# EAGLE board sensori di linea soccer 2018 (EAGLE 8.5.2)
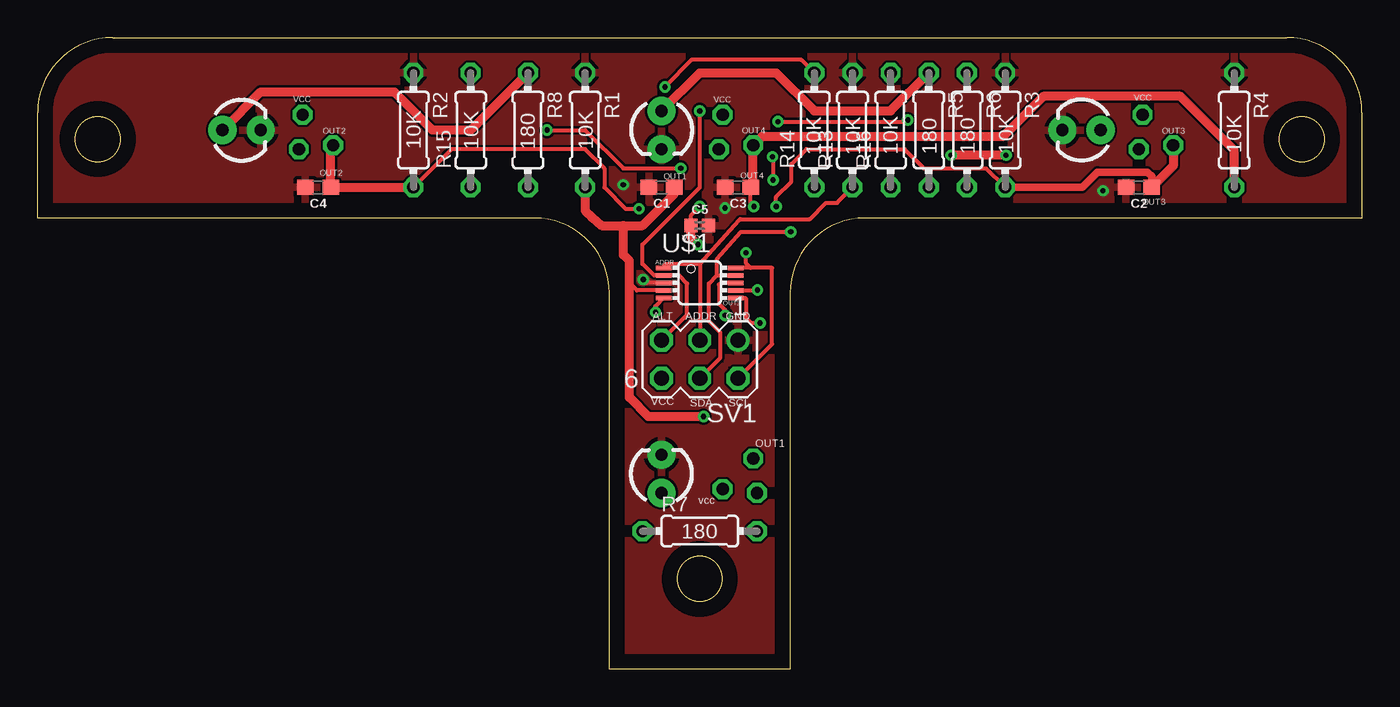
[diagram p0: board, top side]
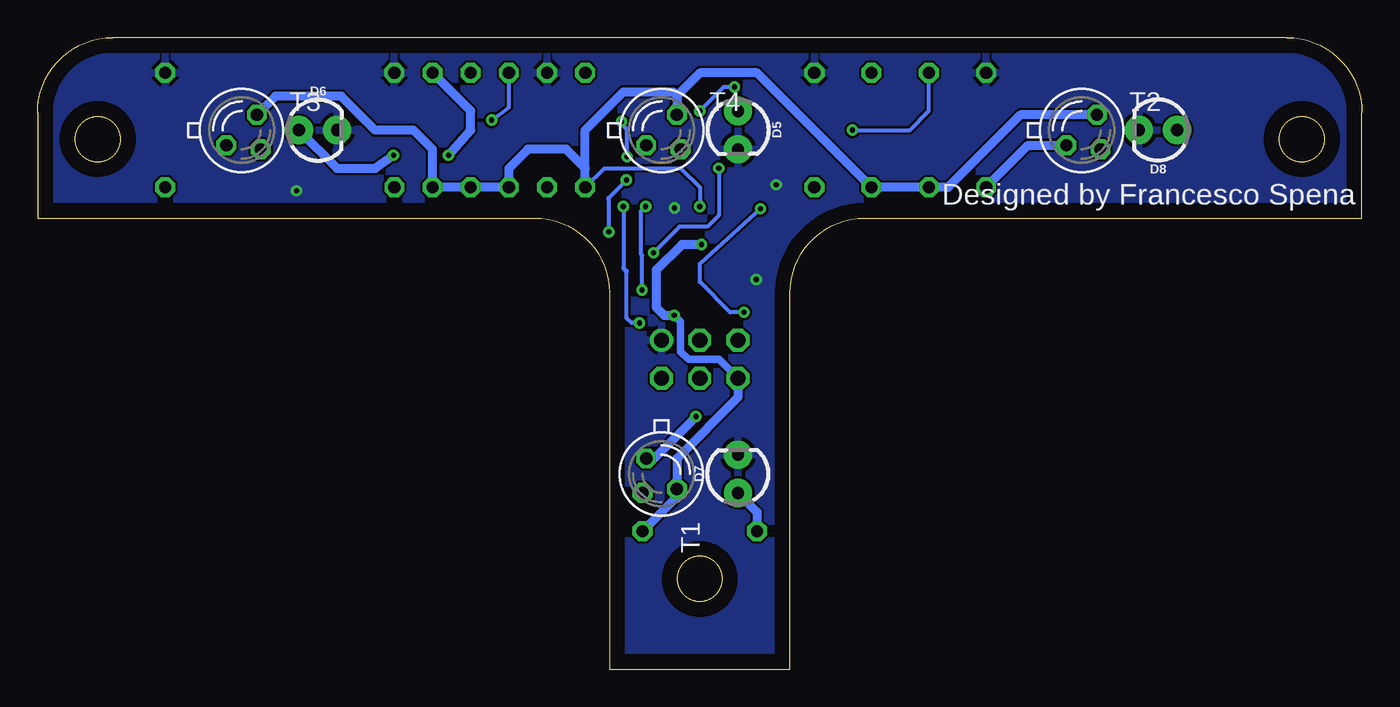
[diagram p1: board, bottom side, seen from below]

Size 88.1 x 42 mm. Coordinates in mm from the lower left corner, seen from the top.
Outline: 50.05,0 38.05,0 38.05,25 arc90 33.05,30 0,30 0,37 arc-90 5,42 83.1,42 arc-90 88.1,37 88.1,30 55.05,30 arc90 50.05,25 50.05,0
Outline: circle at 4,35.25 radius 1.5
Outline: circle at 84.1,35.25 radius 1.5
Outline: circle at 44.05,6 radius 1.5
Copper layers (1*16): Top 0.035mm / dielectric 1.5mm / Bottom 0.035mm
Design rules "default": minimum track width 6mil, minimum drill 0.35mm, track to track 6mil, track to pad 6mil, pad to pad 6mil, via to via 6mil, smd to smd 6mil, copper to edge 40mil, drill to drill 6mil, minimum pad ring 10mil, minimum via ring 8mil, stop-mask expansion 4mil, vias tented up to drill 0mil, thermal gap 10mil

## Footprints (pad centres in the part's own frame; a part is rotated, then mirrored left to right if it is on the bottom)
0603 = smd 1.1 x 1: 1 -0.85,0; 2 0.85,0
0402 = smd 0.85 x 0.9: 1 -0.58,0; 2 0.58,0
LED_3MM = drill 0.813 pad 1.88: A -1.27,0; K 1.27,0
0204/7 = drill 0.813 octagon: 1 -3.81,0; 2 3.81,0
MA03-2 = drill 1.016: 1 -2.54,-1.27 | drill 1.016 octagon: 2 -2.54,1.27; 3 0,-1.27; 4 0,1.27; 5 2.54,-1.27; 6 2.54,1.27
BP103 = drill 0.813 octagon: B 1.27,-1.27; C 1.016,1.016; E -1.016,-1.016
MSOP10_0.5 = smd 0.3 x 1.02: 1 -1,-2.4; 2 -0.5,-2.4; 3 0,-2.4; 4 0.5,-2.4; 5 1,-2.4; 6 1,2.4; 7 0.5,2.4; 8 0,2.4; 9 -0.5,2.4; 10 -1,2.4

## Placement (x,y rotation side)
C1  3.3nF  [0603]  41.51,32.04 180 top
C2  3.3nF  [0603]  73.26,32.04 180 top
C3  3.3nF  [0603]  46.59,32.04 180 top
C4  3.3nF  [0603]  18.65,32.04 180 top
C5  1.0uF  [0402]  44.05,29.5 0 top
D5  [LED_3MM]  41.51,35.85 270 bottom
D6  [LED_3MM]  69.45,35.85 0 bottom
D7  [LED_3MM]  41.51,12.99 90 bottom
D8  [LED_3MM]  13.57,35.85 180 bottom
R1  10K  [0204/7]  36.43,35.85 270 top
R2  10K  [0204/7]  25,35.85 270 top
R3  10K  [0204/7]  64.37,35.85 270 top
R4  10K  [0204/7]  79.61,35.85 270 top
R5  180  [0204/7]  59.29,35.85 270 top
R6  180  [0204/7]  61.83,35.85 270 top
R7  180  [0204/7]  44.05,9.18 0 top
R8  [0204/7]  32.62,35.85 270 top
R13  10K  [0204/7]  54.21,35.85 90 top
R14  10K  [0204/7]  51.67,35.85 90 top
R15  10K  [0204/7]  28.81,35.85 90 top
R16  10K  [0204/7]  56.75,35.85 90 top
SV1  [MA03-2]  44.05,20.61 180 top
T1  BP103  [BP103]  46.59,12.99 270 bottom
T2  BP103  [BP103]  18.65,35.85 0 bottom
T3  BP103  [BP103]  74.53,35.85 0 bottom
T4  BP103  [BP103]  46.59,35.85 0 bottom
U$1  ADS1015IDGT  [MSOP10_0.5]  44.05,25.69 270 top

## Library data of the parts
C1-C4 = SparkFun-Capacitors; PROD_ID: CAP-09633
C5 = SparkFun-Capacitors; PROD_ID: CAP-12417
D5-D8 = SparkFun-LED; PROD_ID: DIO-08794
R1-R4 R13-R16 = resistor
R5-R8 = rcl
SV1 = con-lstb; OC_FARNELL: unknown; OC_NEWARK: unknown
T1-T4 = opto-trans-siemens; OC_FARNELL: unknown; OC_NEWARK: unknown
U$1 = bt_adc

## Nets
ADDR: R13.1 SV1.3 U$1.1
ALERT: R14.2 SV1.5 U$1.2
GND: C1.2 C2.2 C3.2 C4.2 C5.2 D5.K D6.K D7.K D8.K R1.1 R2.1 R3.1 R4.1 R13.2 SV1.1 U$1.3
N$2: D5.A R5.1
N$3: D6.A R6.1
N$4: D7.A R7.1
N$5: D8.A R8.1
OUT1: C1.1 R1.2 T1.E U$1.4
OUT2: C4.1 R2.2 T2.E U$1.5
OUT3: C2.1 R3.2 T3.E U$1.6
OUT4: C3.1 R4.2 T4.E U$1.7
SCL: R15.2 SV1.2 U$1.10
SDA: R16.2 SV1.4 U$1.9
VCC: C5.1 R5.2 R6.2 R7.2 R8.2 R14.1 R15.1 R16.1 SV1.6 T1.C T2.C T3.C T4.C U$1.8

## Tracks (layer width: path | path; a pad name or v marks a point on that pad's centre or on a via)
ADDR
  Top 0.254: U$1.1 arc-90 41.92,26.96 44.05,26.96 | 44.05,26.96 SV1.3 | 44.05,26.96 46.67,29.86 46.74,29.93 51.37,29.93 52.45,31.01 53.18,31.01 R13.1
ALERT  (via drill 0.35)
  Top 0.254: v44.05,37.12 44.05,32.04 40.24,28.23 40.24,26.96 41.01,26.19 U$1.2 42.66,26.19 43.21,25.64 43.21,23.58 SV1.5 | R14.2 50.81,40.52 43.52,40.52 41.74,38.75 v41.74,38.72
  Bottom 0.254: 41.71,38.72 v41.74,38.72 42.45,38.72 v44.05,37.12
GND  (via drill 0.35)
  Top 0.254: U$1.3 40.52,25.69 v40.29,25.92
  other vias: 70.87,31.81 38.97,32.22 45.73,30.67
  pour Top: 46.59,46.01 -1.67,46.01 -1.67,-2.25 91.04,-2.25 91.04,46.01
  pour Bottom: 27.54,46.01 -1.67,46.01 -1.67,-2.25 91.04,-2.25 91.04,46.01
N$2
  Top 0.61: D5.A 44.05,39.66 49.13,39.66 51.67,37.12 56.75,37.12 R5.1
N$3  (via drill 0.35)
  Top 0.61: v64.42,34.17 v60.76,34.17
  Bottom 0.61: D6.A 68.18,33.31 65.64,33.31 v64.42,34.17 | v60.76,34.17 59.29,35.85 59.29,37.12 R6.1
N$4
  Bottom 0.61: D7.A 40.24,10.45 R7.1
N$5
  Top 0.61: D8.A 14.84,38.39 23.73,38.39 26.27,35.85 28.81,35.85 R8.1
OUT1  (via drill 0.35)
  Top 0.254: U$1.4 39.87,25.19 39.37,25.69
  Top 0.61: 38.97,29.5 40.24,29.5 42.36,31.62 C1.1 | v44.31,16.8 40.64,16.8 39.37,18.07 39.37,25.69 39.37,27.15 38.97,27.55 38.97,29.5 | R1.2 36.43,30.49 36.88,30.04 37.52,29.5 38.97,29.5
  Bottom 0.61: v44.31,16.8 47.1,14.01 T1.E
OUT2  (via drill 0.35)
  Top 0.254: R2.2 27.54,34.58 36.43,34.58 37.7,33.31 37.7,32.04 39.12,30.62 v40.01,30.62 | U$1.5 41.11,24.14 v41.11,23.73
  Top 0.61: T2.E 19.5,34.67 C4.1 R2.2
  Bottom 0.254: v40.01,30.62 44.05,26.96 44.05,25.75 42.03,23.73 v41.11,23.73
  Bottom 0.61: T2.E 22.21,34.83 R2.2
OUT3  (via drill 0.35)
  Top 0.254: R3.2 63.1,33.31 58.95,33.31 57.68,34.58 51.14,34.58 50.15,33.59 50.15,32.42 49.13,31.41 v49.13,30.77 | U$1.6 47.07,24.69 47.14,24.62 47.14,23.35 47.47,23.03 v48.06,23.03
  Top 0.508: R3.2 69.5,32.04 70.52,33.06 73.82,33.06 74.11,32.77 C2.1
  Top 0.61: C2.1 75.55,33.48 T3.E
  Bottom 0.254: v49.13,30.77 49.13,26.7 | 49.13,26.7 48.91,26.47 | 49.13,26.7 49.09,26.6 48.91,26.41 48.91,23.35 48.59,23.03 v48.06,23.03
OUT4  (via drill 0.35)
  Top 0.254: U$1.7 47.87,25.19 v47.89,25.21 | v47.65,30.77 47.44,30.98 C3.1
  Top 0.61: C3.1 47.61,32.21 T4.E 48.19,35.42 64.23,35.42 66.91,38.1 76.03,38.1 79.61,34.52 R4.2
  Bottom 0.254: v47.89,25.21 47.89,27.52 47.96,27.6 47.96,30.46 v47.65,30.77
SCL  (via drill 0.35)
  Top 0.254: SV1.2 48.86,21.61 48.86,26.69 47.43,26.69 | 47.43,26.69 U$1.10 | v33.89,35.85 36.43,35.85 38.97,33.31 v42.78,33.31 | 47.43,26.69 47.13,26.99 v47.13,27.7
  Bottom 0.254: v33.89,35.85 30.08,35.85 28.81,37.12 R15.2 | 46.59,28.23 v47.13,27.7 45.4,29.42 43.54,29.42 42.78,30.19 v42.78,33.31
SDA  (via drill 0.35)
  Top 0.254: v49.26,36.41 57.79,36.41 v57.89,36.51 | SV1.4 45.42,20.71 45.42,22.39 44.66,23.15 44.66,25.64 45.21,26.19 | 45.21,26.19 U$1.9 | 45.21,26.19 45.21,27.28 46.81,29.08 v50.11,29.08 | 48.9,34.06 v48.89,34.08 48.93,34.04 v48.93,32.52
  Bottom 0.254: v48.89,34.08 48.89,35.84 v49.26,36.41 | v57.89,36.51 56.75,37.38 R16.2 | v50.11,29.08 50.13,31.24 50.13,31.32 v48.93,32.52
VCC  (via drill 0.35)
  Top 0.254: C5.1 43.47,30.19 v44.05,30.77 | U$1.8 45.46,25.69 45.33,25.56 45.33,24.28 45.75,23.86 v45.75,23.53
  Top 0.61: v43.94,28.23 43.47,28.7 C5.1
  Bottom 0.254: R14.1 50.4,33.31 45.32,33.31 44.05,32.04 v44.05,30.77
  Bottom 0.508: SV1.6 42.78,20.61 44.81,20.61 45.32,21.12 45.32,23.1 v45.75,23.53
  Bottom 0.61: SV1.6 41.51,18.07 45.58,14.01 T1.C 45.58,11.47 R7.2 | T2.C 22.72,36.87 27.54,32.04 R15.1 R8.2 40.24,39.66 44.05,39.66 45.58,38.14 | 45.58,38.14 T4.C | 45.58,38.14 45.83,38.39 49.13,38.39 51.67,35.85 R14.1 51.67,33.31 52.94,34.58 55.48,34.58 56.75,33.31 R16.1 R5.2 R6.2 61.83,34.58 63.1,35.85 65.64,35.85 67.9,38.11 72.27,38.11 T3.C | v45.75,23.53 46.41,23.53 46.95,24.07 46.95,26.53 45.25,28.23 v43.94,28.23

## Text on the board
tPlace: VCC | VCC | VCC | OUT2 | OUT4 | OUT3 | 10K | 10K | 180 | 10K | 10K | 10K | 10K | 180 | 180 | 10K | 10K | OUT2 | OUT1 | OUT4 | OUT3 | VCC | ADDR | OUT3 | ALT | ADDR | GND | VCC | SDA | SCL | OUT1 | vcc | 180
bPlace: Designed by Francesco Spena